# EAGLE board Routing_option1d (EAGLE 9.6.2)
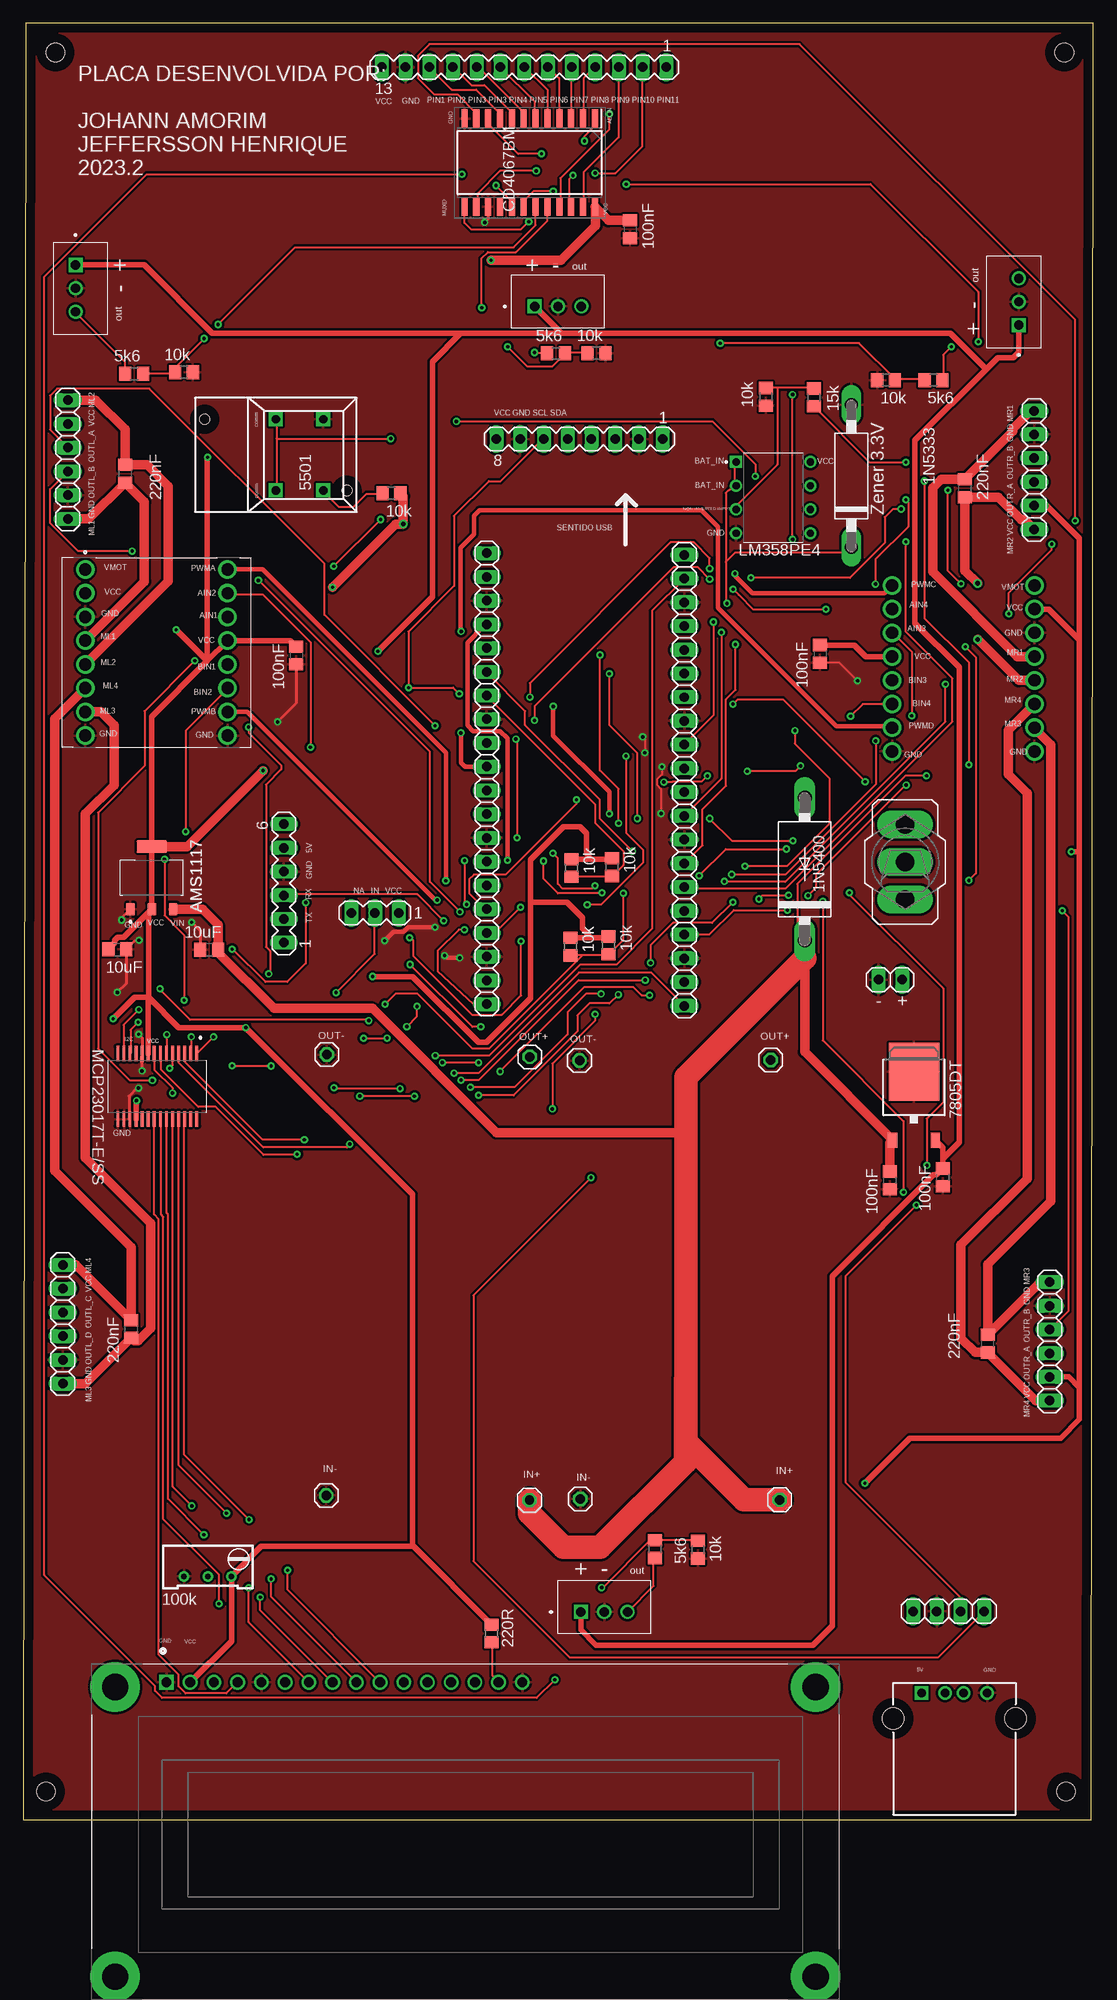
[diagram p0: board, top side]
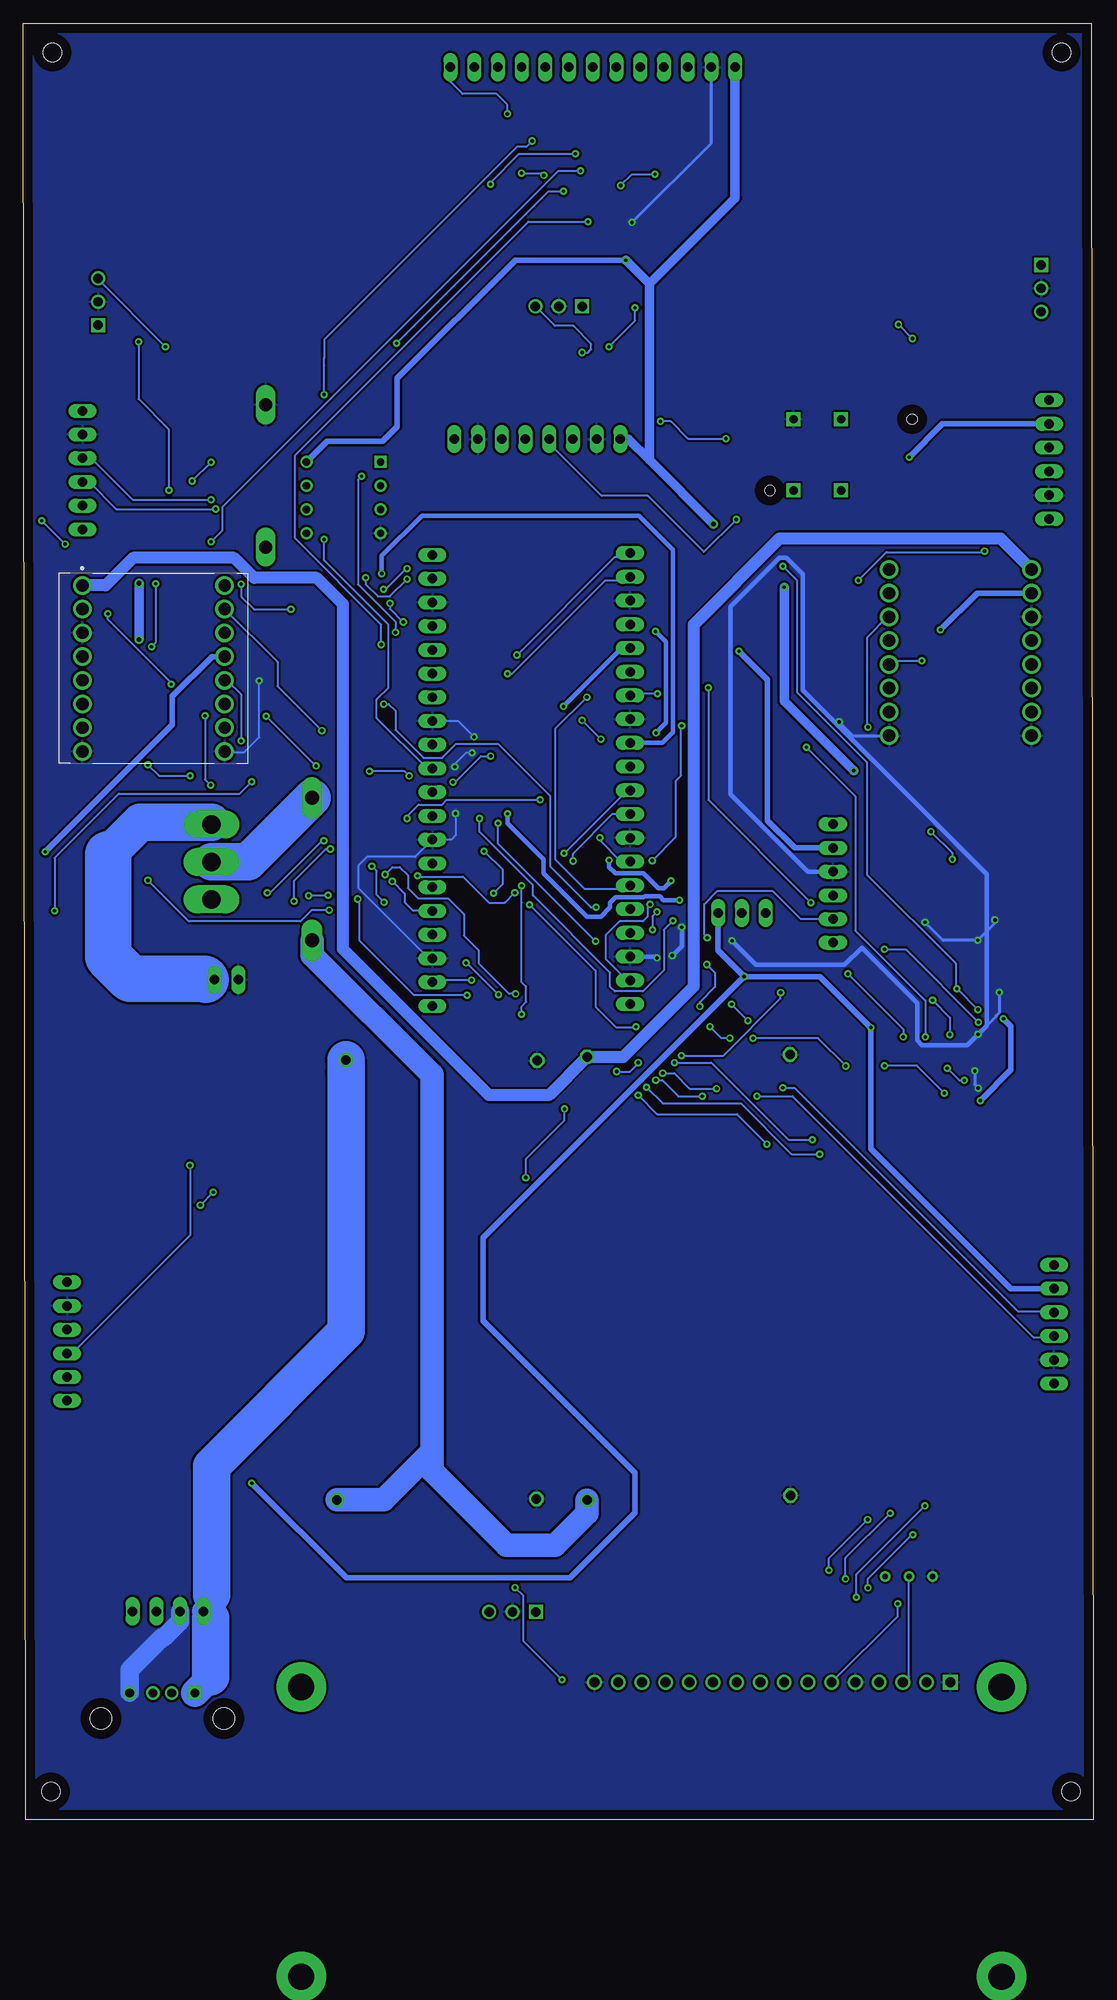
[diagram p1: board, bottom side, seen from below]

Size 114.58 x 192.29 mm. Coordinates in mm from the lower left corner, seen from the top.
Outline: 0,0 114.35,0 114.58,192.29 0.23,192.29 0,0
Copper layers (1*16): Top 0.035mm / dielectric 1.5mm / Bottom 0.035mm
Design rules "default *": minimum track width 0.2mm, minimum drill 0.35mm, track to track 10mil, track to pad 10mil, pad to pad 10mil, via to via 10mil, smd to smd 10mil, copper to edge 40mil, drill to drill 6mil, minimum pad ring 10mil, minimum via ring 8mil, stop-mask expansion 4mil, vias tented up to drill 0mil, thermal gap 10mil
Holes 2 mm at 3.43,189.16 111.46,189.18 2.41,3.03 111.64,3.03

## Footprints (pad centres in the part's own frame; a part is rotated, then mirrored left to right if it is on the bottom)
SOT229P700X180-4N = smd 1.31 x 0.93: 1 -3.345,2.29; 2 -3.345,0; 3 -3.345,-2.29 | smd 1.31 x 3.24: 4 3.345,0
1X02 = drill 1.016 long: 1 -1.27,0; 2 1.27,0
C0805 = smd 1.3 x 1.5: 1 -0.95,0; 2 0.95,0
C1702-15 = drill 1.397 long: A 7.62,0; C -7.62,0
DO201-15 = drill 1.499 long: A 7.62,0; C -7.62,0
JST_B3B-XH-A(LF)(SN) = drill 1 square: 1 -2.5,-0.525 | drill 1: 2 0,-0.525; 3 2.5,-0.525
LCD_NHD-14432WG-BTFH-V#T = drill 1.05 square: 1 -32.55,16.3 | drill 1.05: 2 -30.01,16.3; 3 -27.47,16.3; 4 -24.93,16.3; 5 -22.39,16.3; 6 -19.85,16.3; 7 -17.31,16.3; 8 -14.77,16.3; 9 -12.23,16.3; 10 -9.69,16.3; 11 -7.15,16.3; 12 -4.61,16.3; 13 -2.07,16.3; 14 0.47,16.3; 15 3.01,16.3; 16 5.55,16.3 | drill 2.8 pad 5.3: S1 -38.05,15.8; S2 -38.05,-15.2; S3 36.95,15.8; S4 36.95,-15.2
1X06 = drill 1.016 long: 1 -6.35,0; 2 -3.81,0; 3 -1.27,0; 4 1.27,0; 5 3.81,0; 6 6.35,0
TO252 = smd 1 x 1.6: 1 -2.28,-4.8; 2 2.28,-4.8 | smd 5.4 x 6.2: 3 0,2.5
SOIC127P1030X265-24N = smd 1.95 x 0.65: 1 -4.725,6.985; 2 -4.725,5.715; 3 -4.725,4.445; 4 -4.725,3.175; 5 -4.725,1.905; 6 -4.725,0.635; 7 -4.725,-0.635; 8 -4.725,-1.905; 9 -4.725,-3.175; 10 -4.725,-4.445; 11 -4.725,-5.715; 12 -4.725,-6.985; 13 4.725,-6.985; 14 4.725,-5.715; 15 4.725,-4.445; 16 4.725,-3.175; 17 4.725,-1.905; 18 4.725,-0.635; 19 4.725,0.635; 20 4.725,1.905; 21 4.725,3.175; 22 4.725,4.445; 23 4.725,5.715; 24 4.725,6.985
1X01 = drill 1.016 octagon: 1 0,0
1X20 = drill 1.016 long: 1 -24.13,0; 2 -21.59,0; 3 -19.05,0; 4 -16.51,0; 5 -13.97,0; 6 -11.43,0; 7 -8.89,0; 8 -6.35,0; 9 -3.81,0; 10 -1.27,0; 11 1.27,0; 12 3.81,0; 13 6.35,0; 14 8.89,0; 15 11.43,0; 16 13.97,0; 17 16.51,0; 18 19.05,0; 19 21.59,0; 20 24.13,0
1X04 = drill 1.016 long: 1 -3.81,0; 2 -1.27,0; 3 1.27,0; 4 3.81,0
OST_USB-A1HSW6 = drill 0.92 square: 1 -3.5,6.51 | drill 0.92: 2 -1,6.51; 3 1,6.51; 4 3.5,6.51 | hole 2.3: -6.57,3.8; 6.57,3.8
R0805 = smd 1.3 x 1.5: 1 -0.95,0; 2 0.95,0
RTRIM64W = drill 0.61: 1 1.27,-2.54; 2 1.27,0; 3 1.27,2.54
320-916 = drill 2.007 long: 1 0,4.013; 2 0,0; 3 0,-4.013
5501 = drill 0.9 pad 1.5 square: 1A 0,3.81; 1B 0,-3.81; NC 5.08,-3.81; NO 5.08,3.81 | hole 1.1: -7.62,3.81; 7.62,-3.81
MA08-1 = drill 1.016 long: 1 -8.89,0; 2 -6.35,0; 3 -3.81,0; 4 -1.27,0; 5 1.27,0; 6 3.81,0; 7 6.35,0; 8 8.89,0
MA06-1 = drill 1.016 long: 1 -6.35,0; 2 -3.81,0; 3 -1.27,0; 4 1.27,0; 5 3.81,0; 6 6.35,0
MA03-1 = drill 1.016 long: 1 -2.54,0; 2 0,0; 3 2.54,0
MA13-1 = drill 1.016 long: 1 -15.24,0; 2 -12.7,0; 3 -10.16,0; 4 -7.62,0; 5 -5.08,0; 6 -2.54,0; 7 0,0; 8 2.54,0; 9 5.08,0; 10 7.62,0; 11 10.16,0; 12 12.7,0; 13 15.24,0
MODULE_ROB-14450 = drill 1.32: 1 -7.62,8.89; 2 -7.62,6.35; 3 -7.62,3.81; 4 -7.62,1.27; 5 -7.62,-1.27; 6 -7.62,-3.81; 7 -7.62,-6.35; 8 -7.62,-8.89; 9 7.62,-8.89; 10 7.62,-6.35; 11 7.62,-3.81; 12 7.62,-1.27; 13 7.62,1.27; 14 7.62,3.81; 15 7.62,6.35; 16 7.62,8.89
DIP794W45P254L959H508Q8 = drill 0.78 pad 1.13 square: 1 -3.97,3.81 | drill 0.78 pad 1.13: 2 -3.97,1.27; 3 -3.97,-1.27; 4 -3.97,-3.81; 5 3.97,-3.81; 6 3.97,-1.27; 7 3.97,1.27; 8 3.97,3.81
SOP65P780X200-28N = smd 1.651 x 0.432: 1 -3.505,4.225; 2 -3.505,3.575; 3 -3.505,2.925; 4 -3.505,2.275; 5 -3.505,1.625; 6 -3.505,0.975; 7 -3.505,0.325; 8 -3.505,-0.325; 9 -3.505,-0.975; 10 -3.505,-1.625; 11 -3.505,-2.275; 12 -3.505,-2.925; 13 -3.505,-3.575; 14 -3.505,-4.225; 15 3.505,-4.225; 16 3.505,-3.575; 17 3.505,-2.925; 18 3.505,-2.275; 19 3.505,-1.625; 20 3.505,-0.975; 21 3.505,-0.325; 22 3.505,0.325; 23 3.505,0.975; 24 3.505,1.625; 25 3.505,2.275; 26 3.505,2.925; 27 3.505,3.575; 28 3.505,4.225

## Placement (x,y rotation side)
AMS1117  AMS1117  [SOT229P700X180-4N]  13.75,100.83 90 top
BAT  [1X02]  92.82,89.93 180 top
C1  220nF  [C0805]  11.53,52.54 270 top
C2  220nF  [C0805]  103.26,50.98 90 top
C3  10uF  [C0805]  10.06,93.18 0 top
C4  10uF  [C0805]  19.9,93.12 180 top
C5  220nF  [C0805]  10.89,144.08 270 top
C6  220nF  [C0805]  100.82,142.53 90 top
C7  100nF  [C0805]  85.29,124.8 270 top
C8  100nF  [C0805]  29.23,124.63 270 top
C9  100nF  [C0805]  92.77,68.45 270 top
C10  100nF  [C0805]  64.95,170.26 270 top
C11  100nF  [C0805]  98.45,68.78 270 top
D1  1N5333  [C1702-15]  88.65,143.84 90 top
D2  1N5400  [DO201-15]  83.66,101.77 90 top
DIR  B3B-XH-A(LF)(SN)  [JST_B3B-XH-A(LF)(SN)]  106.06,162.49 90 top
DS1  NHD-14432WG-BTFH-V#T  [LCD_NHD-14432WG-BTFH-V#T]  47.88,-1.57 0 top
ENCODER_LEFT  [1X06]  4.75,145.61 270 top
ENCODER_LEFT1  [1X06]  4.22,53.06 270 top
ENCODER_RIGHT  [1X06]  108.24,144.47 90 top
ENCODER_RIGHT1  [1X06]  109.9,51.22 90 top
ESQ  B3B-XH-A(LF)(SN)  [JST_B3B-XH-A(LF)(SN)]  6.12,163.93 270 top
FRENT  B3B-XH-A(LF)(SN)  [JST_B3B-XH-A(LF)(SN)]  57.25,162.51 0 top
IC1  7805DT  [TO252]  95.36,77.57 0 top
IC2  CD4067BM  [SOIC127P1030X265-24N]  54.21,177.37 270 top
JP1  [1X01]  54.2,34.22 270 top
JP2  [1X01]  32.43,34.73 270 top
JP3  [1X01]  32.49,81.93 270 top
JP4  [1X01]  54.22,81.67 270 top
JP6  [1X20]  49.62,111.46 270 top
JP7  [1X20]  70.78,111.27 90 top
JP8  [1X01]  80.99,34.27 270 top
JP9  [1X04]  99.08,22.33 180 top
JP10  [1X01]  59.64,34.36 270 top
JP11  [1X01]  59.56,81.28 270 top
JP12  [1X01]  80.03,81.34 270 top
P1  USB-A1HSW6  [OST_USB-A1HSW6]  99.69,7.08 0 top
R1  5k6  [R0805]  57.03,156.95 180 top
R2  10k  [R0805]  61.37,156.97 180 top
R3  100k  [RTRIM64W]  19.75,27.34 270 top
R4  5k6  [R0805]  11.87,154.79 180 top
R5  10k  [R0805]  17.2,154.93 180 top
R6  5k6  [R0805]  97.45,154.11 0 top
R7  10k  [R0805]  92.37,154.11 0 top
R8  5k6  [R0805]  67.64,28.99 270 top
R9  10k  [R0805]  72.25,28.93 90 top
R10  220R  [R0805]  50.13,19.96 90 top
R11  10k  [R0805]  39.42,142 0 top
R12  10k  [R0805]  63.03,101.98 90 top
R13  10k  [R0805]  62.66,93.6 90 top
R14  10k  [R0805]  58.59,93.48 90 top
R15  10k  [R0805]  58.71,101.89 90 top
R16  15k  [R0805]  84.65,152.26 270 top
R17  10k  [R0805]  79.52,152.32 90 top
S1  [320-916]  94.43,102.54 0 top
S2  5501  [5501]  27.03,146.11 0 top
SV1  [MA08-1]  59.55,147.8 180 top
SV2  [MA06-1]  27.89,100.24 90 top
SV3  [MA03-1]  37.64,97.08 180 top
SV4  [MA13-1]  53.61,187.6 180 top
TRAS  B3B-XH-A(LF)(SN)  [JST_B3B-XH-A(LF)(SN)]  62.2,22.79 0 top
U1  ROB-14450  [MODULE_ROB-14450]  14.25,124.95 0 top
U2  ROB-14450  [MODULE_ROB-14450]  100.64,123.25 0 bottom
U3  LM358PE4  [DIP794W45P254L959H508Q8]  80.29,141.54 0 top
U4  MCP23017T-E/SS  [SOP65P780X200-28N]  14.35,78.52 270 top

## Library data of the parts
AMS1117 = AMS1117_REGULADOR; AVAILABILITY: In Stock; DESCRIPTION: 1A LOW DROPOUT VOLTAGE REGULATOR SOT-223; MF: Advanced Monolithic Systems; MP: AMS1117; PACKAGE: SOT-223 Seeed Technology; PRICE: None
BAT ENCODER_LEFT ENCODER_LEFT1 ENCODER_RIGHT ENCODER_RIGHT1 JP1-JP4 JP6-JP12 = pinhead
C1-C11 = rcl; SPICEPREFIX: C
D1 D2 = diode
DIR ESQ FRENT TRAS = B3B-XH-A_LF__SN_; AVAILABILITY: In Stock; DESCRIPTION: Connector Header Through Hole 3 position 0.098 (2.50mm); MF: JST Sales; MP: B3B-XH-A(LF)(SN); PACKAGE: None; PRICE: None; PURCHASE-URL: https://pricing.snapeda.com/search/part/B3B-XH-A(LF)(SN)/?ref=eda
DS1 = NHD-14432WG-BTFH-V_T; AVAILABILITY: In Stock; DESCRIPTION: - Graphic LCD Display Module Transflective Black (White - Inverted) FSTN - Film Super-Twisted Nematic Parallel, 8-Bit - 144 x 32; MF: Newhaven Display; MP: NHD-14432WG-BTFH-V#T; PACKAGE: None; PRICE: None; PURCHASE-URL: https://pricing.snapeda.com/search?q=NHD-14432WG-BTFH-V#T&ref=eda
IC1 = linear
IC2 = CD4067BM; ARROW_PART_NUMBER: CD4067BM; ARROW_PRICE-STOCK: https://www.arrow.com/en/products/cd4067bm/texas-instruments; DESCRIPTION: Analog Multiplexer/Demultiplexer SOIC24 Texas Instruments CD4067BM, Multiplexer/Demultiplexer Single 16:1, 3 18 V, 24-Pin SOIC; HEIGHT: 2.65mm; MANUFACTURER_NAME: Texas Instruments; MANUFACTURER_PART_NUMBER: CD4067BM; MOUSER_PART_NUMBER: 595-CD4067BM; MOUSER_PRICE-STOCK: https://www.mouser.co.uk/ProductDetail/Texas-Instruments/CD4067BM?qs=LSR%252BNeaw%2FwBojsvkXxI5Ew%3D%3D
P1 = USB-A1HSW6; AVAILABILITY: In Stock; DESCRIPTION: USB-A (USB TYPE-A) - Receptacle Connector 4 Position Through Hole, Right Angle; MF: On Shore; MP: USB-A1HSW6; PACKAGE: None; PRICE: None; PURCHASE-URL: https://pricing.snapeda.com/search?q=USB-A1HSW6&ref=eda
R1 R2 R4-R17 = rcl; SPICEPREFIX: R
R3 = rcl; SPICEMODEL: X; SPICEPREFIXL: POT
S1 S2 = switch
SV1-SV4 = con-lstb; OC_FARNELL: unknown; OC_NEWARK: unknown
U1 U2 = ROB-14450; AVAILABILITY: In Stock; DESCRIPTION: TB6612FNG Motor Controller/Driver Power Management Evaluation Board; MF: SparkFun Electronics; MP: ROB-14450; PACKAGE: None; PRICE: None; PURCHASE-URL: https://pricing.snapeda.com/search/part/ROB-14450/?ref=eda
U3 = LM358PE4; AVAILABILITY: In Stock; DESCRIPTION: Dual, 30-V, 700-kHz operational amplifier; MF: Texas Instruments; MP: LM358PE4; PACKAGE: PDIP-8 Texas; PRICE: None; PURCHASE-URL: https://pricing.snapeda.com/search?q=LM358PE4&ref=eda
U4 = MCP23017T-E_SS; AVAILABILITY: In Stock; DESCRIPTION: I/O Expander 16 I²C 1.7 MHz 28-SSOP; MF: Microchip; MP: MCP23017T-E/SS; PACKAGE: SSOP-28 Microchip; PRICE: None; PURCHASE-URL: https://pricing.snapeda.com/search?q=MCP23017T-E/SS&ref=eda

## Nets
5V: C11.1 DIR.1 ESQ.1 FRENT.1 IC1.2 SV2.5 TRAS.1
5V_UP: JP9.4 JP12.1 P1.1
AD2: JP7.14
AD_PIN: IC2.1 JP7.11
AIN1: U1.14 U4.1
AIN2: U1.15 U4.2
AIN3: U2.14 U4.3
AIN4: U2.15 U4.4
BAT_IN: D1.C JP7.12 U3.1 U3.2
BIN1: U1.12 U4.5
BIN2: U1.11 U4.6
BIN3: U2.12 U4.7
BIN4: U2.11 U4.8
D1: DS1.4 U4.21
D2: DS1.6 U4.22
D3: DS1.7 U4.23
D4: DS1.8 U4.24
D5: DS1.9 U4.25
D6: DS1.10 U4.26
GND: AMS1117.1 BAT.2 C3.2 C4.2 C7.2 C8.2 C9.2 C10.2 C11.2 D1.A DIR.2 DS1.1 DS1.5 DS1.16 ENCODER_LEFT1.5 ENCODER_LEFT.5 ENCODER_RIGHT1.5 ENCODER_RIGHT.5 ESQ.2 FRENT.2 IC1.3 IC2.12 IC2.15 JP2.1 JP3.1 JP6.3 JP6.8 JP6.13 JP6.18 JP7.3 JP7.8 JP7.13 JP7.18 JP9.3 JP10.1 JP11.1 P1.4 R2.1 R3.1 R5.1 R7.1 R9.1 R17.1 S2.NO SV1.2 SV1.7 SV2.4 SV4.12 TRAS.2 U1.3 U1.8 U1.9 U2.3 U2.8 U2.9 U3.4 U4.10 U4.15 U4.16 U4.17
LED+: DS1.15 R10.1
ML1: C5.2 ENCODER_LEFT.6 U1.4
ML2: C5.1 ENCODER_LEFT.1 U1.5
ML3: C1.2 ENCODER_LEFT1.6 U1.7
ML4: C1.1 ENCODER_LEFT1.1 U1.6
MR1: C6.2 ENCODER_RIGHT.6 U2.4
MR2: C6.1 ENCODER_RIGHT.1 U2.5
MR3: C2.2 ENCODER_RIGHT1.6 U2.7
MR4: C2.1 ENCODER_RIGHT1.1 U2.6
MUXA: IC2.10 JP7.4
MUXB: IC2.11 JP7.5
MUXC: IC2.14 JP7.6
MUXD: IC2.13 JP7.7
N$2: D2.A S1.2
N$3: BAT.1 S1.1
N$4: R11.1 S2.NC
N$5: SV3.3
N$6: R16.1 R17.2 U3.3
N$13: SV1.4
N$14: SV1.3
N$16: SV1.1
N$17: SV2.6
N$26: SV2.1
N$47: U4.27
N$48: U4.28
NET$4: JP7.20
NET$5: JP7.17
NET$6: JP7.16
NET$7: JP7.15
NET$8: JP7.10
NET$15: JP7.9 S2.1A S2.1B
OUTL_A: ENCODER_LEFT.3 JP6.19
OUTL_B: ENCODER_LEFT.4 JP6.20
OUTL_C: ENCODER_LEFT1.3 JP7.1
OUTL_D: ENCODER_LEFT1.4 JP7.2
OUTR_A: ENCODER_RIGHT.3 JP6.14
OUTR_B: ENCODER_RIGHT.4 JP6.15
OUTR_C: ENCODER_RIGHT1.3 JP6.16
OUTR_D: ENCODER_RIGHT1.4 JP6.17
PIN1: IC2.9 SV4.11
PIN2: IC2.8 SV4.10
PIN3: IC2.7 SV4.9
PIN4: IC2.6 SV4.8
PIN5: IC2.5 SV4.7
PIN6: IC2.4 SV4.6
PIN7: IC2.3 SV4.5
PIN8: IC2.2 SV4.4
PIN9: IC2.23 SV4.3
PIN10: IC2.22 SV4.2
PIN11: IC2.21 SV4.1
PWMA: JP6.4 U1.16
PWMB: JP6.5 U1.10
PWMC: JP6.9 U2.16
PWMD: JP6.10 U2.10
RX0: JP6.2 SV2.3
RX1: JP6.12 JP9.2
S1: FRENT.3 R1.2
S1_OUT: IC2.20 R1.1 R2.2
S2: ESQ.3 R4.2
S2_OUT: IC2.19 R4.1 R5.2
S3: DIR.3 R6.2
S3_OUT: IC2.18 R6.1 R7.2
S4: R8.2 TRAS.3
S4_OUT: IC2.17 R8.1 R9.2
S5: IC2.16
SCL: JP6.7 R12.1 R15.1 SV1.6 U4.12
SDA: JP6.6 R13.1 R14.1 SV1.5 U4.13
TX0: JP6.1 SV2.2
TX1: JP6.11 JP9.1
V0: DS1.3 R3.2
VCC: AMS1117.2 AMS1117.4 C3.1 C7.1 C8.1 C10.1 DS1.2 ENCODER_LEFT1.2 ENCODER_LEFT.2 ENCODER_RIGHT1.2 ENCODER_RIGHT.2 IC2.24 R3.3 R10.2 R11.2 R12.2 R13.2 R14.2 R15.2 SV1.8 SV3.1 SV4.13 U1.2 U1.13 U2.2 U2.13 U3.8 U4.9 U4.18
VCC_OUT: JP7.19 SV3.2
VIN: AMS1117.3 C4.1 C9.1 D2.C IC1.1 JP1.1 JP8.1 R16.2
VMOT: JP4.1 U1.1 U2.1

## Tracks (layer width: path | path; a pad name or v marks a point on that pad's centre or on a via)
5V  (via drill 0.35)
  Top 0.61: IC1.2 98.45,71.97 98.45,70.79 | 98.45,70.79 C11.1 97.75,69.04 97.46,69.04 86.61,58.18 86.61,20.79 84.54,18.72 61.33,18.72 59.7,20.35 TRAS.1 | 98.45,70.79 100.2,72.54 100.2,123.35 95.48,128.07 95.48,147.67 103.09,155.28 | 103.09,155.28 104.32,156.51 106.01,156.51 106.58,157.09 DIR.1 | 103.09,155.28 99.27,159.11 57.63,159.11 | FRENT.1 57.63,159.11 | 57.63,159.11 46.84,159.11 | 46.84,159.11 20.24,159.11 12.92,166.43 ESQ.1 | 46.84,159.11 43.79,156.07 43.79,130.92 v37.97,125.1
  Bottom 0.61: v37.97,125.1 34.88,122.01 34.88,106.97 31.97,104.05 SV2.5
5V_UP
  Bottom 2: 94.54,15.32 95.14,14.71
  Bottom 2.54: 94.54,21.59 JP9.4 94.47,23.13 94.47,24.07
  Bottom 3: 95.14,14.71 95.14,14.64 P1.1 | 80.03,79.99 80.01,79.97 | 94.47,24.07 94.42,24.11
  Bottom 4: 94.54,21.59 94.54,15.32 | JP12.1 80.03,79.99 | 80.01,79.97 80.01,52.29 94.42,37.87 94.42,24.11
AD_PIN  (via drill 0.35)
  Top 0.2: v60.09,179.69 60.09,180.23 61.11,181.25 61.11,182.06 IC2.1 | v82.36,137.06 v82.36,152.56
  Bottom 0.2: v82.36,152.56 82.36,155.68 82.36,156.49 82.36,158.43 61.73,179.07 60.72,179.07 v60.09,179.69 | v82.36,137.06 82.36,134.81 75.49,127.93 75.49,121.18 76.74,119.93 76.74,117.93 71.36,112.56 70.86,112.56 JP7.11
AIN1  (via drill 0.35)
  Top 0.2: v20.36,83.81 18.61,82.06 U4.1 | v26.28,90.56 26.41,90.68 26.41,93.02 25.99,93.43 25.99,110.81 27.61,112.43 27.61,112.88 24.14,116.36 v24.14,116.97
  Bottom 0.2: v26.28,90.56 20.36,84.64 v20.36,83.81 | v24.14,116.97 24.24,117.08 24.24,126.55 21.99,128.81 U1.14
AIN2  (via drill 0.35)
  Top 0.2: v17.99,83.81 17.99,82.06 U4.2 | v30.74,114.81 30.74,126.06 25.61,131.18 21.99,131.18 U1.15
  Bottom 0.2: v17.99,83.81 17.99,87.68 25.49,95.18 25.49,109.56 v30.74,114.81
AIN3  (via drill 0.35)
  Top 0.2: v30.09,72.81 30.08,72.82 25.6,72.82 17.24,81.18 17.24,81.93 U4.3 | v48.74,81.06 v44.86,81.06 | v51.05,80.11 51.05,80.12 60.1,89.17 65.29,89.17 66.19,88.27 v67.06,88.27 | v84.02,98.94 84.86,99.78 84.86,101.18 94.44,110.76 v94.53,110.76 | v95.12,118.18 95.12,125.05 93.11,127.06 U2.14 | v78.77,98.57 79.16,98.96 v81.93,98.96
  Bottom 0.2: v30.09,72.81 32.67,72.81 40.92,81.06 v44.86,81.06 | v51.05,80.11 49.63,80.11 48.74,80.99 v48.74,81.06 | v84.02,98.94 84,98.96 v81.93,98.96 | v95.12,118.18 95.12,111.36 v94.53,110.76 | v67.06,88.27 72.72,88.27 78.57,94.13 78.57,98.38 v78.77,98.57
AIN4  (via drill 0.35)
  Top 0.2: v34.95,72.33 34.61,72 25.68,72 16.61,81.06 16.61,81.93 U4.4 | v48.74,77.56 52.49,77.56 59.33,84.4 59.33,86.12 60.6,87.39 62.75,87.39 v63.7,88.34 | v67.16,91.73 67.16,93.61 69.56,96 73.75,96 v75.97,98.23 | v77.27,102.08 81.77,102.08 86.33,106.65 86.33,111.49 82.61,115.21 v82.61,116.6
  Bottom 0.2: v34.95,72.33 38.16,75.54 46.72,75.54 v48.74,77.56 | v67.16,91.73 67.1,91.73 v63.7,88.34 | v77.27,102.08 76.75,101.57 76.75,99 v75.97,98.23 | U2.15 87.36,123.94 87.36,121.35 v82.61,116.6
BAT_IN  (via drill 0.35)
  Top 0.2: 76.23,145.29 76.26,145.28 76.29,145.31 | v73.89,128.21 73.89,118.21 70.86,115.18 JP7.12 | v75.32,130.2 75.21,130.2 75.21,134.64 | 75.21,134.64 75.21,142.03 75.49,142.31 U3.2 76.11,143.17 76.11,145.31 76.29,145.31 | 88.61,136.31 D1.C 88.07,135.64 76.21,135.64 75.21,134.64 | U3.1 76.29,145.31
  Bottom 0.2: v75.32,130.2 v75.33,130.2 75.33,129.62 73.93,128.21 v73.89,128.21
BIN1  (via drill 0.35)
  Top 0.2: v15.66,80.46 15.99,80.79 15.99,81.93 U4.5 | v13.82,79.15 11.4,79.15 7.99,82.56 7.99,107.81 12.99,112.81 12.99,118.68 v18.36,124.06
  Bottom 0.2: v15.66,80.46 15.66,80.43 14.38,79.15 v13.82,79.15 | v18.36,124.06 21.49,124.06 U1.12
BIN2  (via drill 0.35)
  Top 0.2: v15.36,84.06 15.36,82.06 U4.6 | v17.22,87.72 17.22,94.71 15.11,96.81 v15.11,102.81 | v17.39,105.79 17.39,116.58 21.86,121.06 U1.11
  Bottom 0.2: v15.36,84.06 15.36,85.87 v17.22,87.72 | v17.39,105.79 15.11,103.51 v15.11,102.81
BIN3  (via drill 0.35)
  Top 0.2: v29.32,71.26 29.25,71.2 25.73,71.2 20.61,76.31 18.74,76.31 14.74,80.31 14.74,81.93 U4.7 | v47.86,78.43 52.61,78.43 58.27,84.09 58.27,86.46 60.22,88.42 v61.86,88.42 | v75.84,101.19 81.62,101.19 91.26,110.83 v91.26,115.49
  Bottom 0.2: v29.32,71.26 32.32,71.26 37.74,76.68 46.11,76.68 v47.86,78.43 | v75.84,101.19 75.05,101.98 74.27,101.98 73.4,101.11 73.4,99.73 72.3,98.64 69.1,98.64 67.4,96.93 67.4,94.66 65.79,93.06 65.79,91.65 62.56,88.42 v61.86,88.42 | v91.26,115.49 91.26,120.46 92.74,121.93 92.99,121.93 U2.12
BIN4  (via drill 0.35)
  Top 0.2: U2.11 89.88,119.44 v88.58,118.13 | v83.22,112.81 82.66,112.25 v77.52,112.25 | v68.58,111.09 69.52,111.09 69.56,111.12 72.63,111.12 v73.26,111.74 | v64.54,113.86 64.54,105.66 66.36,103.83 66.36,102.47 61.86,97.96 v60.38,97.96 | v48.98,84.89 48.07,84.89 v41.4,91.56 | U4.8 14.02,80.31 15.97,78.36 v15.97,77.79 | v22.36,80.72 26.5,80.72 v26.53,80.7 | v36.44,83.67 36.46,83.69 v38.94,83.69 | v41.06,84.91 42.15,86 v42.15,87.07
  Bottom 0.2: v88.58,118.13 83.26,112.81 v83.22,112.81 | v77.52,112.25 77.48,112.29 73.8,112.29 v73.26,111.74 | v68.58,111.09 68.37,111.09 65.59,113.86 v64.54,113.86 | v60.38,97.96 53.31,90.89 53.31,87.06 51.1,84.84 49.02,84.84 v48.98,84.89 | v41.4,91.56 v41.4,91.54 40.51,90.65 40.51,89.16 42.15,87.52 v42.15,87.07 | v15.97,77.79 18.9,80.72 v22.36,80.72 | v26.53,80.7 29.5,83.67 v36.44,83.67 | v38.94,83.69 39.85,83.69 41.06,84.9 v41.06,84.91
D1
  Top 0.2: U4.21 13.99,74.93 13.99,64.81 14.49,64.31 14.49,17.68 16.61,15.56 16.61,14.31 17.36,13.56 21.74,13.56 22.86,14.68 DS1.4
D2  (via drill 0.35)
  Top 0.2: v20.95,23.13 20.95,26.22 14.99,32.18 14.99,64.56 14.74,64.81 14.74,74.93 U4.22
  Bottom 0.2: DS1.6 20.95,21.81 v20.95,23.13
D3  (via drill 0.35)
  Top 0.2: v19.33,30.53 15.49,34.37 15.49,64.81 15.36,64.93 15.36,74.93 U4.23 | v24.13,24.84 24.13,21.17 30.49,14.81 DS1.7
  Bottom 0.2: v24.13,24.84 24.13,25.84 19.44,30.53 v19.33,30.53
D4  (via drill 0.35)
  Top 0.2: v18.04,33.61 15.99,35.67 15.99,74.93 U4.24 | v25.37,23.83 25.37,22.43 32.99,14.81 DS1.8
  Bottom 0.2: v25.37,23.83 25.37,26.29 v18.04,33.61
D5  (via drill 0.35)
  Top 0.2: v21.75,32.83 16.61,37.97 16.61,74.93 U4.25 | v26.54,25.8 26.54,23.88 35.61,14.81 DS1.9
  Bottom 0.2: v26.54,25.8 26.54,28.04 v21.75,32.83
D6  (via drill 0.35)
  Top 0.2: v24.18,32.15 17.24,39.09 17.24,74.93 U4.26 | v28.31,26.73 28.31,24.62 38.11,14.81 DS1.10
  Bottom 0.2: v28.31,26.73 28.31,28.02 v24.18,32.15
GND  (via drill 0.35)
  Top 0.2: v89.33,121.92 87.4,123.85 C7.2 | v66.32,115.92 66.54,115.7 v66.54,114.22 | v68.38,112.73 68.38,111.92 67.85,111.39 67.85,110.78 68.29,110.34 v68.29,107.72
  Top 0.305: U4.17 11.31,75.01 11.31,77.48 12.15,78.33 v12.34,78.33 | 12.69,81.07 12.69,80.18 v12.71,80.17 | 12.69,81.07 12.69,81.69 | 12.69,81.07 12.72,81.09 U4.10 12.71,83.72 v12.35,84.09 | v10.07,88.57 11.01,89.51 C3.2 11.99,94.15 v12.38,94.15 | v10.54,96.32 10.54,96.57 AMS1117.1 | v18.03,96.08 18.95,95.16 C4.2 | IC2.15 49.77,171.35 v49.4,170.99 | C8.2 29.23,119.52 v27.23,117.52
  Top 0.508: v46.73,92.26 45.35,92.26 v45.1,92.51 | v44.08,95.53 41.19,95.53 40.7,95.05 39.64,95.05 v38.68,94.09
  Bottom 0.2: JP7.3 71.19,92.22 78.73,99.77 78.73,102.12 77.78,103.08 72.62,103.08 JP7.8 68.74,104.92 68.29,105.37 v68.29,107.72 | U2.9 92.92,114.25 90.95,114.25 89.33,115.88 v89.33,121.92 | JP7.13 68.03,117.62 v66.32,115.92 | v68.38,112.73 68.38,113 67.15,114.22 v66.54,114.22
  Bottom 0.305: v12.34,78.33 12.7,78.69 v12.7,80.16 v12.71,80.17 | v10.07,88.57 10.07,86.42 10.41,86.08 10.41,86.02 v12.35,84.09 | v10.54,96.32 10.54,96 v12.38,94.15 16.1,94.15 v18.03,96.08 | v49.4,170.99 40.91,179.48 SV4.12 | v27.23,117.52 25.77,116.06 U1.9
  Bottom 0.508: JP6.18 46.88,92.41 v46.73,92.26 | v45.1,92.51 44.08,93.53 v44.08,95.53 | v38.68,94.09 36.13,91.54 26.64,91.54 24.81,93.37 18.88,87.43 18.88,83.44 18.36,82.92 13.51,82.92 11.42,85.01 11.42,101.22 31.13,120.94 31.13,133.33 32.87,135.07 33.61,135.07 38.85,129.83 38.85,109.79 30.57,101.51 SV2.4
  Bottom 2: JP9.3 97.81,21.25 99.52,19.55 99.72,19.55 103.19,16.08 P1.4
  pour Top: -0.97,-0.47 -0.97,194.49 114.78,195.49 114.78,-0.47
  pour Bottom: -0.85,-0.02 -0.85,192.69 115.47,192.69 115.47,-0.02
LED+
  Top 0.2: R10.1 50.24,18.93 50.24,15.43 50.86,14.81 DS1.15
ML1
  Top 1: U1.4 12.95,132.54 12.95,141.07 C5.2 7.02,139.26 ENCODER_LEFT.6
ML2
  Top 1: U1.5 15.52,132.57 15.52,142.75 13.24,145.03 C5.1 10.89,148.84 7.77,151.96 ENCODER_LEFT.1
ML3
  Top 1: U1.7 8.28,118.6 9.71,117.17 9.71,110.75 6.64,107.67 6.64,70.86 13.62,63.88 13.62,52.61 12.28,51.27 11.84,51.27 C1.2 6.64,46.71 ENCODER_LEFT1.6
ML4
  Top 1: U1.6 3.34,117.85 3.34,69.49 11.53,61.31 C1.1 5.61,59.41 ENCODER_LEFT1.1
MR1
  Top 1: U2.4 106.45,124.52 97.38,133.59 97.38,142.56 98.31,143.48 C6.2 105.96,148.62 105.96,148.91 107.87,150.82 ENCODER_RIGHT.6
MR2  (via drill 0.5)
  Top 1: U2.5 106.57,121.98 v102.19,126.36 | v102.19,132.36 100.82,133.72 C6.1 104.42,141.58 106.85,139.15 107.21,139.15 ENCODER_RIGHT.1
  Bottom 1: v102.19,126.36 v102.19,132.36
MR3
  Top 1: U2.7 108.26,116.82 110.01,115.08 110.01,66.22 103.26,59.48 C2.2 108.91,57.57 ENCODER_RIGHT1.6
MR4
  Top 1: U2.6 105.47,116.65 105.47,111.91 107.49,109.89 107.49,68.65 100.4,61.56 100.4,51.56 101.91,50.05 103.24,50.05 C2.1 108.42,44.87 ENCODER_RIGHT1.1
MUXA  (via drill 0.35)
  Top 0.2: v55.47,178.32 52.98,178.32 49.86,181.43 49.86,182.06 IC2.10 | v64.56,175.07 90.71,175.07 102.25,163.54 v102.25,158.22 | v98.99,142.31 98.99,133.71 v100.4,132.3 | v101.24,100.56 101.99,101.31 101.99,124.43 v100.86,125.56 | v81.82,97.39 76.07,97.39 73.49,94.81 70.86,94.81 JP7.4
  Bottom 0.2: v55.47,178.32 61.48,178.32 64.56,175.24 v64.56,175.07 | v101.24,100.56 96.86,96.18 84.89,96.18 83.69,97.39 v81.82,97.39 | v102.25,158.22 102.25,152.1 98.99,148.84 v98.99,142.31 | v100.4,132.3 100.4,126.02 v100.86,125.56
MUXB  (via drill 0.35)
  Top 0.2: v112.61,139.06 112.61,160.56 83.11,190.06 43.49,190.06 42.24,188.81 42.24,186.43 43.99,184.68 46.49,184.68 48.49,182.68 48.49,182.18 IC2.11 | v110.11,136.56 110.11,135.93 105.53,131.35 v105.53,129.09 | v98.74,121.56 98.74,117.56 81.6,100.41 75.1,100.41 v75.06,100.45
  Bottom 0.2: v110.11,136.56 v112.61,139.06 | v105.53,129.09 105.53,128.48 98.74,121.69 v98.74,121.56 | v75.06,100.45 73.75,99.14 73.75,98.21 72.85,97.3 JP7.5
MUXC  (via drill 0.35)
  Top 0.2: v54.92,176.5 51.06,176.5 48.61,174.06 48.61,172.68 IC2.14 | v94.49,136.81 94.49,127.18 99.49,122.18 99.49,117.56 81.62,99.68 70.94,99.68 JP7.6
  Bottom 0.2: v54.92,176.5 57.28,176.5 93.24,140.54 93.24,138.06 v94.49,136.81
MUXD  (via drill 0.35)
  Top 0.2: v54.11,171.06 53.26,170.2 47.98,170.2 47.24,170.94 47.24,172.56 IC2.13 | v76.25,125.81 76.25,120.95 75.24,119.93 75.24,110.68 72.74,108.18 72.74,104.31 70.86,102.43 JP7.7
  Bottom 0.2: v54.11,171.06 60.49,171.06 85.49,146.06 85.49,137.18 76.25,127.95 v76.25,125.81
N$2
  Bottom 4: S1.2 90.51,102.54 D2.A
N$3
  Bottom 2.54: BAT.1 94.17,90.01 95.15,90.01
  Bottom 3.5: S1.1 94.43,106.8
  Bottom 4: 94.43,106.8 102.06,106.8 105.49,103.37
  Bottom 5: 105.49,103.37 105.49,92.37 103.13,90.01 95.15,90.01 95.07,89.93
N$4
  Top 0.2: R11.1 38.36,141.93 36.74,141.93 35.36,140.56 33.74,140.56 32.11,142.18 S2.NC
N$6
  Top 0.2: 80.74,153.31 84.61,153.31 R16.1 | 80.74,153.31 79.61,153.31 R17.2 | 80.74,153.31 80.74,145.06 76.55,140.87 U3.3
NET$15  (via drill 0.35)
  Top 0.2: 27.11,147.84 27.11,149.81 S2.1A | 27.11,147.84 27.11,142.31 S2.1B | v74.74,127.1 74.75,127.09 74.75,111.44 70.86,107.56 JP7.9 | v78.36,143.81 78.36,145.13 73.81,149.68 v46.36,149.68 | 27.11,147.84 v39.34,147.84
  Bottom 0.2: v74.74,127.1 74.74,128.25 78.74,132.25 78.74,143.44 v78.36,143.81 | v39.34,147.84 43.41,147.84 45.25,149.68 v46.36,149.68
OUTL_A  (via drill 0.35)
  Top 0.2: v44.09,117.12 32.24,128.97 32.24,134.43 13.49,153.18 3.61,153.18 2.86,152.43 2.86,148.81 4.74,146.93 ENCODER_LEFT.3 | v47.24,102.68 47.23,102.67 47.23,98.23 v47.47,97.99
  Bottom 0.2: v44.09,117.12 44.13,117.12 44.14,117.11 44.14,111.78 44.74,111.18 44.74,105.18 v47.24,102.68 | v47.47,97.99 47.74,97.72 47.74,96.68 48.24,96.18 50.74,96.18 52.24,94.68 52.24,92.18 50.24,90.18 49.74,90.18 JP6.19
OUTL_B  (via drill 0.35)
  Top 0.2: v11.66,135.81 5.86,135.81 2.86,138.81 2.86,142.43 4.74,144.31 ENCODER_LEFT.4 | v25.17,132.67 25.36,132.47 25.38,132.47 43.54,114.32 43.54,100.4 46.74,97.21 v46.74,97.18 | v47.22,95.28 46.63,95.28 44.37,93.02 44.37,90.85 48.18,87.33 JP6.20
  Bottom 0.2: v11.66,135.81 11.78,135.68 22.15,135.68 v25.17,132.67 | v47.22,95.28 47.22,96.7 v46.74,97.18
OUTL_C  (via drill 0.35)
  Top 0.2: v40.35,78.28 33.34,78.28 v33.26,78.37 | v46.11,79.93 48.74,79.93 59.49,90.68 67.24,90.68 70.74,87.18 JP7.1
  Bottom 0.2: v33.26,78.37 32.01,78.37 8.08,54.43 4.24,54.43 ENCODER_LEFT1.3 | v46.11,79.93 44.89,79.93 43.23,78.28 v40.35,78.28
OUTL_D  (via drill 0.35)
  Top 0.2: v41.88,77.45 36.06,77.45 v36.03,77.48 | v46.86,79.18 48.74,79.18 59.45,89.9 v66.59,89.9 v66.59,89.89
  Bottom 0.2: v36.03,77.48 32.22,77.48 6.43,51.68 4.24,51.68 ENCODER_LEFT1.4 | v46.86,79.18 46.17,79.18 44.43,77.45 v41.88,77.45 | v66.59,89.89 70.57,89.89 JP7.2
OUTR_A  (via drill 0.35)
  Top 0.2: v73.49,132.81 72.24,134.06 69.61,134.06 54.74,119.18 v54.74,117.68 | v77.91,132.95 88.5,132.95 92.24,136.68 92.24,139.43 93.11,140.31 v93.99,140.31 | v52.74,115.68 52.85,115.57 v52.85,105.14
  Bottom 0.2: v73.49,132.81 75.34,130.96 76.6,130.96 77.91,132.27 v77.91,132.95 | v93.99,140.31 104.61,140.31 107.49,143.18 108.11,143.18 ENCODER_RIGHT.3 | v54.74,117.68 v52.74,115.68 | v52.85,105.14 52.85,104.85 50.58,102.57 JP6.14
OUTR_B  (via drill 0.35)
  Top 0.2: v73.49,133.93 73.49,135.06 71.8,136.75 69.3,136.75 54.24,121.68 v54.24,120.18 | v76,131.71 76.6,131.12 78.18,129.54 85.9,129.54 v85.93,129.57 | v91.25,132.27 91.25,134.95 94.74,138.43 94.74,141.06 v94.49,141.31
  Bottom 0.2: v76,131.71 75.8,131.71 73.58,133.93 v73.49,133.93 | v91.25,132.27 91.25,130.94 89.89,129.57 v85.93,129.57 | v94.49,141.31 102.86,141.31 107.24,145.68 108.11,145.68 ENCODER_RIGHT.4 | v54.24,120.18 57.64,116.78 57.64,102.81 54.52,99.68 49.74,99.68 JP6.15
OUTR_C  (via drill 0.35)
  Top 0.2: v96.74,70.06 96.74,75.06 98.49,76.81 98.49,89.01 88.46,99.04 v88.46,99.25 | v82.4,104.82 75.86,104.82 v73.49,107.18 | v59.24,109.18 59.24,108.77 51.66,101.18 48.24,101.18 47.74,100.68 47.74,99.18 49.24,97.68 JP6.16
  Bottom 0.2: v96.74,70.06 96.74,62.56 109.24,50.06 109.86,50.06 ENCODER_RIGHT1.3 | v88.46,99.25 88.15,99.25 82.58,104.82 v82.4,104.82 | v59.24,109.18 69.24,109.18 69.74,108.68 72.24,108.68 73.74,107.18 v73.49,107.18
OUTR_D  (via drill 0.35)
  Top 0.2: v111.24,97.31 111.86,96.68 111.86,54.43 109.99,52.56 ENCODER_RIGHT1.4 | v90.13,111.12 81.32,119.93 76.49,119.93 v75.99,119.43 | v53.24,97.68 50.74,95.18 49.74,95.18 JP6.17
  Bottom 0.2: v111.24,97.31 111.24,102.96 104.34,109.86 91.4,109.86 v90.13,111.12 | v75.99,119.43 75.45,119.43 74.74,118.72 74.74,116.68 71.74,113.68 69.74,113.68 68.24,115.18 63.74,115.18 58.17,109.62 58.17,102.06 53.8,97.68 v53.24,97.68
PIN1
  Top 0.2: IC2.9 50.99,182.18 50.99,182.68 48.49,185.18 45.86,185.18 43.49,187.56 SV4.11
PIN2
  Top 0.2: IC2.8 52.24,182.18 52.24,182.81 49.36,185.68 47.99,185.68 46.11,187.56 SV4.10
PIN3
  Top 0.2: IC2.7 53.49,182.18 53.49,182.81 48.61,187.68 SV4.9
PIN4
  Top 0.2: IC2.6 54.74,182.18 54.74,183.93 51.11,187.56 SV4.8
PIN5
  Top 0.2: IC2.5 56.11,182.18 56.11,185.18 53.74,187.56 SV4.7
PIN6
  Top 0.2: IC2.4 57.36,182.18 57.36,186.43 56.24,187.56 SV4.6
PIN7
  Top 0.2: IC2.3 58.61,182.18 58.61,187.56 SV4.5
PIN8
  Top 0.2: IC2.2 59.99,182.18 59.99,186.43 61.11,187.56 SV4.4
PIN9
  Top 0.2: IC2.23 59.99,172.68 59.99,176.34 63.74,180.09 63.74,187.56 SV4.3
PIN10  (via drill 0.35)
  Top 0.2: IC2.22 58.44,172.86 58.44,175.61 v58.85,176.01 | v61.22,176.26 63.4,176.26 66.24,179.1 66.24,187.56 SV4.2
  Bottom 0.2: v58.85,176.01 59.09,176.26 v61.22,176.26
PIN11  (via drill 0.35)
  Top 0.2: IC2.21 57.49,172.68 57.49,175.71 62.75,180.98 v62.75,182.59
  Bottom 0.2: v62.75,182.59 62.75,183.59 63.9,184.74 67.57,184.74 68.85,186.02 SV4.1
PWMA  (via drill 0.35)
  Top 0.2: 49.24,127.68 JP6.4
  Top 0.508: U1.16 25.63,133.84 45.24,114.24 v45.24,100.52 | 49.24,127.68 47.56,126.01 47.56,117.15 48.17,116.54 51.06,116.54 51.85,115.75 v51.85,102.71
  Bottom 0.508: v45.24,100.52 45.24,100.47 46,99.71 46.59,99.71 48.18,101.3 51.19,101.3 51.85,101.96 v51.85,102.71
PWMB  (via drill 0.35)
  Top 0.508: U1.10 23.98,118.6 44.12,98.46 v44.32,98.46 | v56.74,119.18 56.74,116.05 62.74,110.05 v62.74,107.68
  Bottom 0.508: v56.74,119.18 50.74,125.18 49.74,125.18 JP6.5 | v62.74,107.68 62.74,106.68 58.9,102.84 58.9,101.34 54.24,96.68 52.74,96.68 51.74,97.68 51.74,98.18 51.16,98.76 48.16,98.76 48.04,98.88 46.44,98.88 46.01,98.46 v44.32,98.46
PWMC  (via drill 0.35)
  Top 0.508: U2.16 92.19,131.31 78.08,131.31 76.2,133.18 v76.2,133.4
  Bottom 0.508: v76.2,133.4 76.2,135.3 71.91,139.6 48.67,139.6 45.01,135.93 45.01,116.42 46.14,115.29 49.61,115.29 JP6.9
PWMD  (via drill 0.35)
  Top 0.508: U2.10 92.86,117.06 87.08,117.06 74.39,129.75 74.39,138.42 72.63,140.18 48.86,140.18 48.26,139.58 48.26,137.62 46.79,136.15 46.79,127.21 v46.88,127.21 | JP6.10 47.32,112.73 47.23,112.82 47.17,112.82 46.85,113.14 v46.85,116.34
  Bottom 0.508: 46.65,116.34 v46.85,116.34 45.77,117.42 45.77,126.1 v46.88,127.21
RX0  (via drill 0.35)
  Top 0.2: v45.02,96.24 42.2,99.06 27.99,99.06 SV2.3 | v62.74,122.68 62.74,117.18 65.74,114.18 v65.74,107.18
  Bottom 0.2: v45.02,96.24 45.99,95.26 45.99,90.93 48.24,88.68 51.24,88.68 51.74,89.18 51.74,90.68 60.01,98.96 60.01,100.01 65.74,105.74 v65.74,107.18 | v62.74,122.68 62.24,122.68 52.24,132.68 49.74,132.68 JP6.2
RX1  (via drill 0.35)
  Top 0.2: v95.61,65.81 88.02,58.22 88.02,36.15 100.24,23.93 100.24,22.43 JP9.2 | v94.24,67.18 94.24,74.81 85.6,83.45 v85.6,98.33 | v81.7,103.92 75.23,103.92 v72.36,101.06 | v55.7,102.63 55.7,100.72 57.24,99.18 61.9,99.18 v61.96,99.24
  Bottom 0.2: v94.24,67.18 v95.61,65.81 | v85.6,98.33 85.6,100.52 82.2,103.92 v81.7,103.92 | v72.36,101.06 72.27,100.96 67.52,100.96 64.74,98.18 63.02,98.18 v61.96,99.24 | JP6.12 49.64,107.67 51.47,107.67 55.7,103.44 v55.7,102.63
S1  (via drill 0.35)
  Top 0.2: v54.74,157.06 55.99,157.06 R1.2
  Bottom 0.2: v54.74,157.06 54.1,157.06 53.77,157.38 53.77,157.99 55.68,159.9 57.66,159.9 FRENT.3
S1_OUT  (via drill 0.35)
  Top 0.2: R2.2 60.36,157.06 57.99,157.06 R1.1 57.99,156.93 56.61,155.56 53.99,155.56 v51.86,157.68 | v49.09,161.84 49.09,167.15 49.74,167.81 52.74,167.81 56.11,171.18 56.11,172.56 IC2.20
  Bottom 0.2: v51.86,157.68 | v51.86,157.68 49.09,160.46 v49.09,161.84
S2
  Top 0.2: R4.2 10.86,154.81 10.86,156.06 5.61,161.31 ESQ.3
S2_OUT  (via drill 0.35)
  Top 0.2: 15.61,154.81 16.24,154.81 R5.2 15.61,154.81 | 15.61,154.81 12.86,154.81 R4.1 | v20.86,160.06 29.11,168.31 52.49,168.31 54.86,170.68 54.86,172.56 IC2.19 | 15.61,154.81 v19.36,158.56
  Bottom 0.2: v19.36,158.56 v20.86,160.06
S3  (via drill 0.35)
  Top 0.2: v99.36,157.68 98.49,156.81 98.49,154.18 R6.2
  Bottom 0.2: v99.36,157.68 106.61,164.93 DIR.3
S3_OUT  (via drill 0.35)
  Top 0.2: 93.36,154.18 96.49,154.18 R6.1 | v56.74,174.31 54.61,174.31 53.61,173.31 53.61,172.68 IC2.18 | v74.61,158.06 89.49,158.06 93.36,154.18 | 93.36,154.18 R7.2
  Bottom 0.2: v56.74,174.31 58.36,174.31 v74.61,158.06
S4
  Top 0.2: R8.2 67.48,27.86 67.48,25.05 64.74,22.31 TRAS.3
S4_OUT  (via drill 0.35)
  Top 0.2: R9.2 72.18,29.99 71.4,29.93 R8.1 67.12,29.94 62.06,24.88 v61.92,24.88 | v50.61,174.93 52.24,173.31 52.24,172.68 IC2.17 | v46.96,176.13 13.18,176.13 2.24,165.18 2.24,26.2 14.11,14.33 14.11,13.81 14.86,13.06 54.95,13.06 v56.91,15.02
  Bottom 0.2: v50.61,174.93 50.61,174.95 49.43,176.13 v46.96,176.13 | v61.92,24.88 61.02,23.98 61.02,19.13 v56.91,15.02
SCL  (via drill 0.35)
  Top 0.2: R15.1 58.74,100.93 62.99,100.93 R12.1 63.11,101.06 64.24,102.18 64.24,103.68 61.24,106.68 61.24,108.68 49.74,120.18 JP6.7 | v12.3,85.38 11.49,84.57 11.49,82.06 U4.12 | v22.36,93.18 22.43,93.18 25.93,89.69 28.25,89.69 30.24,91.68 v30.24,98.18 | 46.11,139.56 46.13,139.57 | 46.13,139.57 49.86,143.3 51.11,143.3 55.49,147.68 55.74,147.68 SV1.6 | 46.13,139.57 46.13,132.07 41.24,127.18 v41.24,121.18 46.03,121.18 v46.68,120.53
  Bottom 0.2: v12.3,85.38 20.11,93.18 v22.36,93.18 | v30.24,98.18 41.24,109.18 v41.24,121.18 | v46.68,120.53 49.44,120.53 JP6.7
SDA  (via drill 0.35)
  Top 0.2: 59.86,92.56 62.61,92.56 R13.1 62.74,92.68 64.24,94.18 v64.24,99.18 | 59.86,92.56 58.61,92.56 R14.1 58.17,92.65 | v12.36,86.73 10.74,85.1 10.74,82.06 U4.13 | v14.63,88.96 14.63,88.85 17.84,85.64 36.91,85.64 v36.99,85.56 | v38.74,87.31 39.86,88.42 42.24,88.42 48.1,82.56 49.86,82.56 59.86,92.56 | v65.24,103.68 61.74,107.18 61.74,109.18 53.74,117.18 53.74,118.68 49.74,122.68 JP6.6 | v38.24,139.18 v33.24,134.18
  Bottom 0.2: v12.36,86.73 v12.36,86.74 14.59,88.96 v14.63,88.96 14.74,89.18 14.74,91.68 24.24,101.18 24.24,113.18 31.74,120.68 31.74,132.68 v33.24,134.18 | v38.74,87.31 v36.99,85.56 | SV1.5 58.24,147.68 58.24,147.31 52.65,141.72 47.71,141.72 41.71,135.71 v38.24,139.18 | v65.24,103.68 63.24,101.68 63.24,100.18 v64.24,99.18
TX0  (via drill 0.35)
  Top 0.2: v61.74,124.68 61.74,112.35 63.74,110.35 v63.74,106.68 | v53.3,94.05 53.3,88.24 51.24,86.18 48.04,86.18 41.74,92.48 41.74,94.14 41.74,94.15 v41.35,94.43
  Bottom 0.2: v41.35,94.43 41.66,94.74 41.66,98.01 40.24,99.43 34.36,99.43 31.36,96.43 27.99,96.43 SV2.2 | v61.74,124.68 51.24,135.18 49.74,135.18 JP6.1 | v63.74,106.68 63.74,104.47 53.32,94.05 v53.3,94.05
TX1  (via drill 0.35)
  Top 0.2: v60.78,68.75 48.18,56.15 48.18,27.71 58.49,17.4 97.96,17.4 102.86,22.31 JP9.1 | v56.64,76.1 56.64,80.96 61.23,85.55 v61.23,86.24 | v56.69,103.48 57.24,102.93 57.24,100.18 57.74,99.68 60.91,99.68 v61.22,99.99
  Bottom 0.2: v60.78,68.75 60.78,70.74 56.64,74.88 v56.64,76.1 | v56.69,103.48 56.64,103.48 49.95,110.17 JP6.11 | v61.22,99.99 61.22,98.2 61.24,98.18 61.24,89.68 60.74,89.18 60.74,87.55 61.23,87.06 v61.23,86.24
V0
  Bottom 0.2: R3.2 19.74,26.06 19.74,15.31 20.36,14.68 DS1.3
VCC  (via drill 0.35, 0.5)
  Top 0.61: 19.7,124.05 13.75,118.1 AMS1117.4 AMS1117.2 | 19.7,124.05 U1.13 28.58,126.22 C8.1 | 19.7,124.05 v16.38,127.38 | AMS1117.2 10.75,94.48 10.13,94.48 9.8,94.16 9.8,93.87 C3.1 | U4.9 13.37,87.44 | 13.37,87.44 13.37,88.05 11.92,88.05 v9.62,85.75 | 13.41,88.05 13.41,97.15 AMS1117.2 | 13.41,88.05 13.41,87.4 13.37,87.44 | U4.18 12.07,76.94 v12.12,76.99 | 13.41,88.05 16.65,84.81 v23.82,84.81 41.65,66.98 41.65,29.39 41.77,29.27 | R15.2 60.85,102.84 | 60.85,102.84 62.94,102.84 R12.2 | R14.2 60.79,94.43 | 60.79,94.43 62.53,94.43 R13.2 | 60.85,102.84 60.3,103.39 60.3,105.61 59.59,106.32 57.83,106.32 54.31,102.79 54.31,98.22 | 60.79,94.43 59.86,95.37 59.86,96.56 58.19,98.22 54.31,98.22 | v37.38,90.27 41.69,90.27 48.74,83.23 49.57,83.23 54.31,87.97 54.31,98.22 | 41.77,29.27 R10.2 | 41.77,29.27 25.48,29.27 R3.3 22.29,19.15 DS1.2 | v90.11,36.05 94.93,40.86 111.07,40.86 113.08,42.87 113.08,46.27 | 113.08,46.27 111.94,47.41 ENCODER_RIGHT1.2 | 113.08,46.27 113.08,103.63 | 113.08,103.63 113.08,126.31 | U2.2 109.8,129.6 113.08,126.31 | 113.08,126.31 113.08,137.17 109.59,140.66 ENCODER_RIGHT.2 | 113.08,103.63 v112.23,103.63 | C7.1 89,125.75 90.23,124.52 U2.13 | 19.7,124.05 19.7,145.82 v19.73,145.85
  Top 1: AMS1117.4 17.54,104.18 v25.67,112.31 | v33.1,131.93 39.87,138.7 v40.68,138.7 40.68,141.69 R11.2 | v50.08,166.93 57.58,166.93 61.26,170.61 61.26,172.58 | 61.26,172.58 IC2.24 | C10.1 62.64,171.21 61.26,172.58
  Bottom 0.61: v16.38,127.38 12.45,131.3 U1.2 | v12.12,76.99 8.83,80.28 8.83,84.96 v9.62,85.75 | v37.38,90.27 29.29,90.27 v23.82,84.81 23.82,71.83 8.87,56.87 ENCODER_LEFT1.2 | v37.38,90.27 40.18,93.07 SV3.1 | v37.38,90.27 37.41,90.27 65.35,62.33 65.35,53.44 49.08,37.18 49.08,32.89 56.05,25.92 79.98,25.92 v90.11,36.05 | v112.23,103.63 98.64,117.22 98.64,120.25 94.37,124.52 U2.13 | v19.73,145.85 16.16,149.42 ENCODER_LEFT.2 | v50.08,166.93 61.89,166.93 74.54,154.28 74.54,149.13 76.11,147.57 82.04,147.57 U3.8
  Bottom 1: v25.67,112.31 33.1,119.75 v33.1,131.93 | v40.68,138.7 47.55,145.58 | 47.55,145.58 49.77,147.8 SV1.8 | 47.55,145.58 47.55,164.41 | v50.08,166.93 47.55,164.41 | 47.55,164.41 38.37,173.58 SV4.13
VCC_OUT  (via drill 0.35)
  Top 0.2: v33.49,88.56 37.61,92.68 37.61,97.06 SV3.2 | v44.11,81.81 49.86,81.81 59.61,91.56 63.49,91.56 67.33,95.4 67.33,129.4 70.74,132.81 JP7.19
  Bottom 0.2: v33.49,88.56 33.49,87.93 39.61,81.81 v44.11,81.81
VIN  (via drill 0.35)
  Top 0.2: C4.1 20.86,93.18 20.85,92.83 | D2.C 82.88,94.93 82.88,100.2 94.43,111.75 v96.71,111.75 | v101.24,112.93 101.24,123.89 96.49,128.64 v96.49,143.31 | v94.49,145.31 90.61,145.31 84.74,151.18 R16.2
  Top 1: D2.C 83.66,82.2 IC1.1 92.77,72.45 C9.1 | 70.96,73.58 50.65,73.58 37.38,86.85 26.83,86.85 20.85,92.83 20.85,95.81 19.17,97.49 AMS1117.3
  Top 2: D2.C 83.66,92.21
  Top 2.54: 83.66,92.21 70.96,79.51 70.96,73.58 70.96,47.24 | JP8.1 77.17,34.27 70.96,40.48 70.96,47.24 | 70.96,47.24 70.88,47.16 70.88,38.28 61.76,29.16 57.85,29.16 54.2,32.82 JP1.1
  Bottom 0.2: v101.24,112.93 100.06,111.75 v96.71,111.75 | v94.49,145.31 v96.49,143.31
  Bottom 2.54: D2.C 83.66,92.57 70.83,79.74 70.83,39.47 | 70.83,39.47 76.02,34.27 JP8.1 | 70.83,39.47 70.83,37.37 62.83,29.38 57.64,29.38 54.2,32.82 JP1.1
VMOT
  Bottom 1.27: U1.1 9.96,137.16 33.57,137.16 42.79,127.94 42.79,89.21 50.33,81.67 JP4.1 58.31,77.58 64.73,77.58 80.36,93.21 80.36,130.12 83.19,132.95 89.86,132.95 92.01,135.09 102.82,135.09 105.77,132.14 U2.1

## Text on the board
_tNames: PIN1 PIN2 PIN3 PIN3 PIN4 PIN5 PIN6 PIN7 PIN8 PIN9 PIN10 PIN11 | VCC | GND | GND | AD_IN | PLACA DESENVOLVIDA POR: / / JOHANN AMORIM / JEFFERSSON HENRIQUE / 2023.2 | MUXD | VCC | - + | + - | out | out | + - | out | ML1 GND OUTL_B OUTL_A VCC ML2 | MR2 VCC OUTR_A OUTR_B GND MR1 | VCC GND SCL SDA | comm | BAT_IN | VCC | BAT_IN | comm | NON INVERTED INPUT | Zener 3.3V | SENTIDO USB | GND | VMOT | PWMA | PWMC | VCC | AIN2 | VMOT | AIN4 | GND | VCC | AIN1 | AIN3 | GND | ML1 | VCC | VCC | MR1 | ML2 | BIN1 | MR2 | ML4 | BIN3 | BIN2 | BIN4 | MR4 | ML3 | PWMB | PWMD | MR3 | GND | GND | GND | GND | 5V | GND | NA IN VCC | RX | AMS1117 | VCC | TX | GND | VIN | - + | I2C | vcc | OUT- | OUT+ | OUT- | OUT+ | GND | ML3 GND OUTL_D OUTL_C VCC ML4 | MR4 VCC OUTR_A OUTR_B GND MR3 | IN- | IN+ | IN+ | IN- | + - | out | GND | VCC | 5V | GND